# Altium PCB PCB1.PcbDoc
Units mil, origin at the board's own origin, x right, y up, seen from the top; angles counter-clockwise.
Board outline 6695 x 705 mil, 2 copper layers (Top Layer, Bottom Layer); 19 components, 59 nets, 174 pads, 1 vias.
Unrouted connection lines stored in the file: 10.
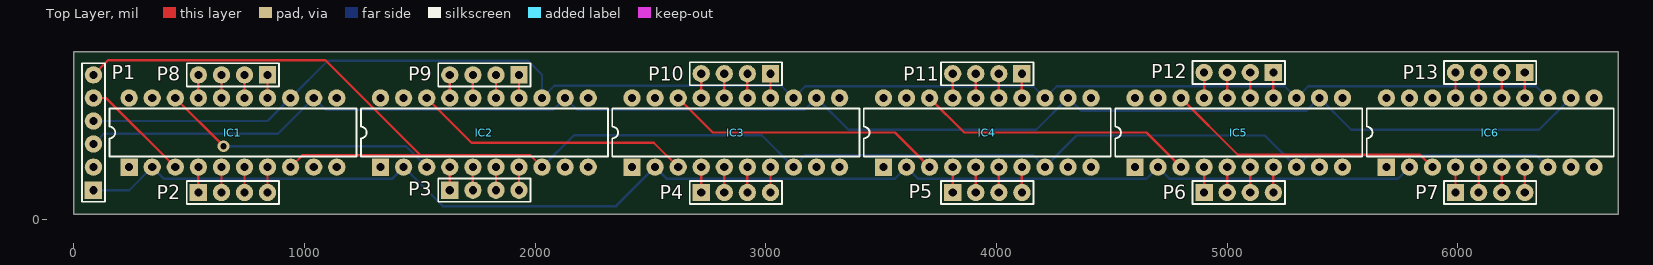
[diagram p0: Top Layer view]
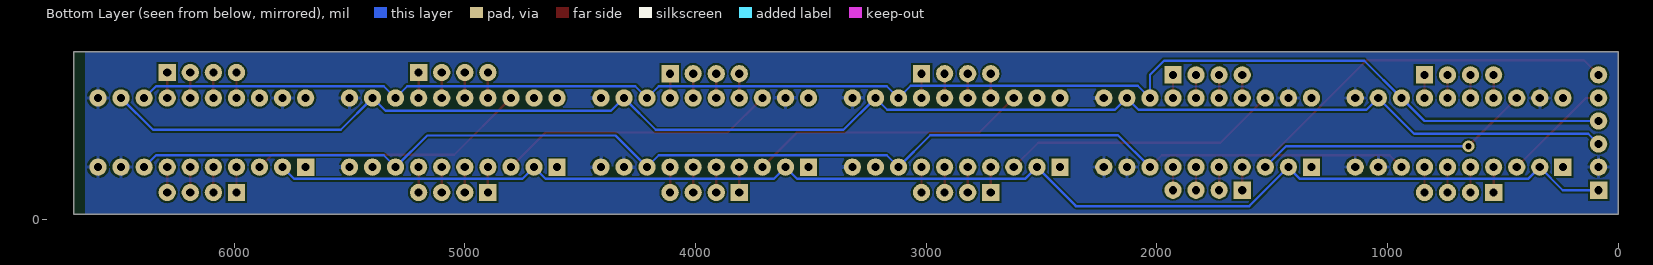
[diagram p1: Bottom Layer view, seen from below]

## Layer stack, top to bottom
Top Solder: solder mask 0.4, Solder Resist, Dk 3.5
Top Layer: signal copper 1.4
Dielectric 1: dielectric 12.6, FR-4, Dk 4.8
Bottom Layer: signal copper 1.4
Bottom Solder: solder mask 0.4, Solder Resist, Dk 3.5

## Board outline
0,20 0,725 6695,725 6695,20

## Design rules (kind name [scope] priority, off if disabled: settings)
Clearance [All] p1: gap=8
PolygonConnect [All] p1: connectstyle=Relief reliefconductorwidth=15 reliefentries=4 polygonreliefangle="90 Angle" airgapwidth=10
RoutingVias [All] p1: holewidth=28 width=50 viastyle="Through Hole" minholewidth=28 minwidth=50 maxholewidth=28 maxwidth=50
SolderMaskExpansion [All] p1: expansion=4
Width [All] p1: maxlimit=15 minlimit=6 preferedwidth=10
29 further rules are at their usual default settings.

## Components (designator, comment, footprint, x,y, rotation, side; value= is the part's Value field where it differs from the comment)
IC1 "TPIC6B596N" PDIP20 690,375 r0 top
IC2 "TPIC6B596N" PDIP20 1780,375 r0 top
IC3 "TPIC6B596N" PDIP20 2870,375 r0 top
IC4 "TPIC6B596N" PDIP20 3960,375 r0 top
IC5 "TPIC6B596N" PDIP20 5050,375 r0 top
IC6 "TPIC6B596N" PDIP20 6140,375 r0 top
P1 "Header 6" HDR1X6 85,125 r90 top
P2 "Header 4" HDR1X4 540,115 r0 top
P3 "Header 4" HDR1X4 1630,125 r0 top
P4 "Header 4" HDR1X4 2720,115 r0 top
P5 "Header 4" HDR1X4 3810,115 r0 top
P6 "Header 4" HDR1X4 4900,115 r0 top
P7 "Header 4" HDR1X4 5990,115 r0 top
P8 "Header 4" HDR1X4 840,625 r180 top
P9 "Header 4" HDR1X4 1930,625 r180 top
P10 "Header 4" HDR1X4 3020,630 r180 top
P11 "Header 4" HDR1X4 4110,630 r180 top
P12 "Header 4" HDR1X4 5200,635 r180 top
P13 "Header 4" HDR1X4 6290,635 r180 top

## Footprints (in the part's own frame and the unit in brackets; to place one, negate y for a bottom-side part, rotate by r counter-clockwise, add the part's x,y. Pads: shape width x height; smd on the part's side, far side on the other; paste and mask are expansions set on the pad)
HDR1X4 [mm] "Connector; Header; 4 Position"
  rect 1.905x1.905 hole 0.9: 1(0,0)
  round 1.905 hole 0.9: 2(2.54,0) 3(5.08,0) 4(7.62,0)
  silkscreen extent -1.27,-1.27 8.89,1.27
HDR1X6 [mm] "Connector; Header; 6 Position"
  rect 1.905x1.905 hole 0.9: 1(0,0)
  round 1.905 hole 0.9: 2(2.54,0) 3(5.08,0) 4(7.62,0) 5(10.16,0) 6(12.7,0)
  silkscreen extent -1.27,-1.27 13.97,1.27
PDIP20 [mm] "DIP; 20 Leads; Row Spacing 7.62 mm; Pitch 2.54 mm"
  rect 1.905x1.905 hole 0.9: 1(-11.43,-3.81)
  round 1.905 hole 0.9: 2(-8.89,-3.81) 3(-6.35,-3.81) 4(-3.81,-3.81) 5(-1.27,-3.81) 6(1.27,-3.81) 7(3.81,-3.81) 8(6.35,-3.81) 9(8.89,-3.81) 10(11.43,-3.81) 11(11.43,3.81) 12(8.89,3.81) 13(6.35,3.81) 14(3.81,3.81) 15(1.27,3.81) 16(-1.27,3.81) 17(-3.81,3.81) 18(-6.35,3.81) 19(-8.89,3.81) 20(-11.43,3.81)
  silkscreen extent -13.6,-2.65 13.6,2.65

## Part data
P1: "Header, 6-Pin"
P2 P3 P4 P5 P6 P7 P8 P9 P10 P11 P12 P13: "Header, 4-Pin"

## Via types
v1: diameter 50, hole 28, Top Layer to Bottom Layer, 1 vias

## Nets (pads, with @x,y where several pads share a name; then routed paths per layer and width w, separated by ;. In a path a pad name is that pad's centre, name@x,y a point inside that pad or via, vN(x,y) a via of type N, cw(c..) or ccw(c..) an arc to the next point about the centre after c; other vN are vias at no path point)
GND: IC1.9 IC1.10 IC1.11 IC1.19 IC2.9 IC2.10 IC2.11 IC2.19 IC3.9 IC3.10 IC3.11 IC3.19 IC4.9 IC4.10 IC4.11 IC4.19 IC5.9 IC5.10 IC5.11 IC5.19 IC6.9 IC6.10 IC6.11 IC6.19 P1.2
NetIC1_3: IC1.3 P1.5 | length 479.3
  Top Layer w10: P1.5 140,525 IC1.3
NetIC1_4: IC1.4 P2.1 | length 110
  Top Layer w10: P2.1 IC1.4
NetIC1_5: IC1.5 P2.2 | length 110
  Top Layer w10: P2.2 IC1.5
NetIC1_6: IC1.6 P2.3 | length 110
  Top Layer w10: P2.3 IC1.6
NetIC1_7: IC1.7 P2.4 | length 110
  Top Layer w10: P2.4 IC1.7
NetIC1_8: IC1.8 IC2.8 IC3.8 IC4.8 IC5.8 IC6.8 P1.6 | length 7419.3
  Top Layer w10: P1.6 148,688 1091,688 1503,276 ; IC1.8 991,276 1503,276 ; IC2.8 1979,276 1503,276
  Bottom Layer w10: IC2.8 2168,363 2982,363 IC3.8 3171,276 4159,276 IC4.8 4347,362 5163,362 IC5.8 5351,276 6339,276 IC6.8
NetIC1_12: IC1.12 IC2.12 IC3.12 IC4.12 IC5.12 IC6.12 P1.3 | length 6847.4
  Bottom Layer w10: P1.3 130,370 885,370 IC1.12 1091,474 2079,474 IC2.12 2181,474 3169,474 IC3.12 3358,387 4172,387 IC4.12 4366,469 5344,469 IC5.12 5538,387 6352,387 IC6.12
NetIC1_13: IC1.13 IC2.13 IC3.13 IC4.13 IC5.13 IC6.13 P1.4 | length 6709
  Bottom Layer w10: P1.4 840,425 IC1.13 1101,686 1969,686 2030,625 IC2.13 2083,578 3067,578 IC3.13 3171,576 4159,576 IC4.13 4261,576 5249,576 IC5.13 5351,576 6339,576 IC6.13
NetIC1_14: IC1.14 P8.1 | length 100
  Top Layer w10: IC1.14 P8.1
NetIC1_15: IC1.15 P8.2 | length 100
  Top Layer w10: IC1.15 P8.2
NetIC1_16: IC1.16 P8.3 | length 100
  Top Layer w10: IC1.16 P8.3
NetIC1_17: IC1.17 P8.4 | length 100
  Top Layer w10: IC1.17 P8.4
NetIC1_18: IC1.18 IC2.3 | length 1214.3
  Top Layer w10: IC1.18 v1(649,316)
  Bottom Layer w10: v1(649,316) 1439,316 IC2.3
NetIC2_4: IC2.4 P3.1 | length 100
  Top Layer w10: P3.1 IC2.4
NetIC2_5: IC2.5 P3.2 | length 100
  Top Layer w10: P3.2 IC2.5
NetIC2_6: IC2.6 P3.3 | length 100
  Top Layer w10: P3.3 IC2.6
NetIC2_7: IC2.7 P3.4 | length 100
  Top Layer w10: P3.4 IC2.7
NetIC2_14: IC2.14 P9.1 | length 100
  Top Layer w10: IC2.14 P9.1
NetIC2_15: IC2.15 P9.2 | length 100
  Top Layer w10: IC2.15 P9.2
NetIC2_16: IC2.16 P9.3 | length 100
  Top Layer w10: IC2.16 P9.3
NetIC2_17: IC2.17 P9.4 | length 100
  Top Layer w10: IC2.17 P9.4
NetIC2_18: IC2.18 IC3.3 | length 1214.3
  Top Layer w10: IC2.18 1724,331 2514,331 IC3.3
NetIC3_4: IC3.4 P4.1 | length 110
  Top Layer w10: P4.1 IC3.4
NetIC3_5: IC3.5 P4.2 | length 110
  Top Layer w10: P4.2 IC3.5
NetIC3_6: IC3.6 P4.3 | length 110
  Top Layer w10: P4.3 IC3.6
NetIC3_7: IC3.7 P4.4 | length 110
  Top Layer w10: P4.4 IC3.7
NetIC3_14: IC3.14 P10.1 | length 105
  Top Layer w10: IC3.14 P10.1
NetIC3_15: IC3.15 P10.2 | length 105
  Top Layer w10: IC3.15 P10.2
NetIC3_16: IC3.16 P10.3 | length 105
  Top Layer w10: IC3.16 P10.3
NetIC3_17: IC3.17 P10.4 | length 105
  Top Layer w10: IC3.17 P10.4
NetIC3_18: IC3.18 IC4.3 | length 1214.3
  Top Layer w10: IC3.18 2770,375 3560,375 IC4.3
NetIC4_4: IC4.4 P5.1 | length 110
  Top Layer w10: P5.1 IC4.4
NetIC4_5: IC4.5 P5.2 | length 110
  Top Layer w10: P5.2 IC4.5
NetIC4_6: IC4.6 P5.3 | length 110
  Top Layer w10: P5.3 IC4.6
NetIC4_7: IC4.7 P5.4 | length 110
  Top Layer w10: P5.4 IC4.7
NetIC4_14: IC4.14 P11.1 | length 105
  Top Layer w10: IC4.14 P11.1
NetIC4_15: IC4.15 P11.2 | length 105
  Top Layer w10: IC4.15 P11.2
NetIC4_16: IC4.16 P11.3 | length 105
  Top Layer w10: IC4.16 P11.3
NetIC4_17: IC4.17 P11.4 | length 105
  Top Layer w10: IC4.17 P11.4
NetIC4_18: IC4.18 IC5.3 | length 1214.3
  Top Layer w10: IC4.18 3860,375 4650,375 IC5.3
NetIC5_4: IC5.4 P6.1 | length 110
  Top Layer w10: P6.1 IC5.4
NetIC5_5: IC5.5 P6.2 | length 110
  Top Layer w10: P6.2 IC5.5
NetIC5_6: IC5.6 P6.3 | length 110
  Top Layer w10: P6.3 IC5.6
NetIC5_7: IC5.7 P6.4 | length 110
  Top Layer w10: P6.4 IC5.7
NetIC5_14: IC5.14 P12.1 | length 110
  Top Layer w10: IC5.14 P12.1
NetIC5_15: IC5.15 P12.2 | length 110
  Top Layer w10: IC5.15 P12.2
NetIC5_16: IC5.16 P12.3 | length 110
  Top Layer w10: IC5.16 P12.3
NetIC5_17: IC5.17 P12.4 | length 110
  Top Layer w10: IC5.17 P12.4
NetIC5_18: IC5.18 IC6.3 | length 1214.3
  Top Layer w10: IC5.18 5046,279 5836,279 IC6.3
NetIC6_4: IC6.4 P7.1 | length 110
  Top Layer w10: P7.1 IC6.4
NetIC6_5: IC6.5 P7.2 | length 110
  Top Layer w10: P7.2 IC6.5
NetIC6_6: IC6.6 P7.3 | length 110
  Top Layer w10: P7.3 IC6.6
NetIC6_7: IC6.7 P7.4 | length 110
  Top Layer w10: P7.4 IC6.7
NetIC6_14: IC6.14 P13.1 | length 110
  Top Layer w10: IC6.14 P13.1
NetIC6_15: IC6.15 P13.2 | length 110
  Top Layer w10: IC6.15 P13.2
NetIC6_16: IC6.16 P13.3 | length 110
  Top Layer w10: IC6.16 P13.3
NetIC6_17: IC6.17 P13.4 | length 110
  Top Layer w10: IC6.17 P13.4
VCC: IC1.2 IC2.2 IC3.2 IC4.2 IC5.2 IC6.2 P1.1 | length 6055.4
  Bottom Layer w10: P1.1 240,125 IC1.2 391,174 1379,174 IC2.2 1599,56 2351,56 IC3.2 2571,174 3559,174 IC4.2 3661,174 4649,174 IC5.2 4751,174 5739,174 IC6.2
pads on no net: IC1.1 IC1.20 IC2.1 IC2.20 IC3.1 IC3.20 IC4.1 IC4.20 IC5.1 IC5.20 IC6.1 IC6.18 IC6.20

## Polygon pours and split planes (outlines as drawn)
GND on Bottom Layer "Bottom-GND" (solid, pour order 13): 0,20 0,725 6645,725 6645,20